# EAGLE board batteryholder2S6P_vertical (EAGLE 9.5.0)
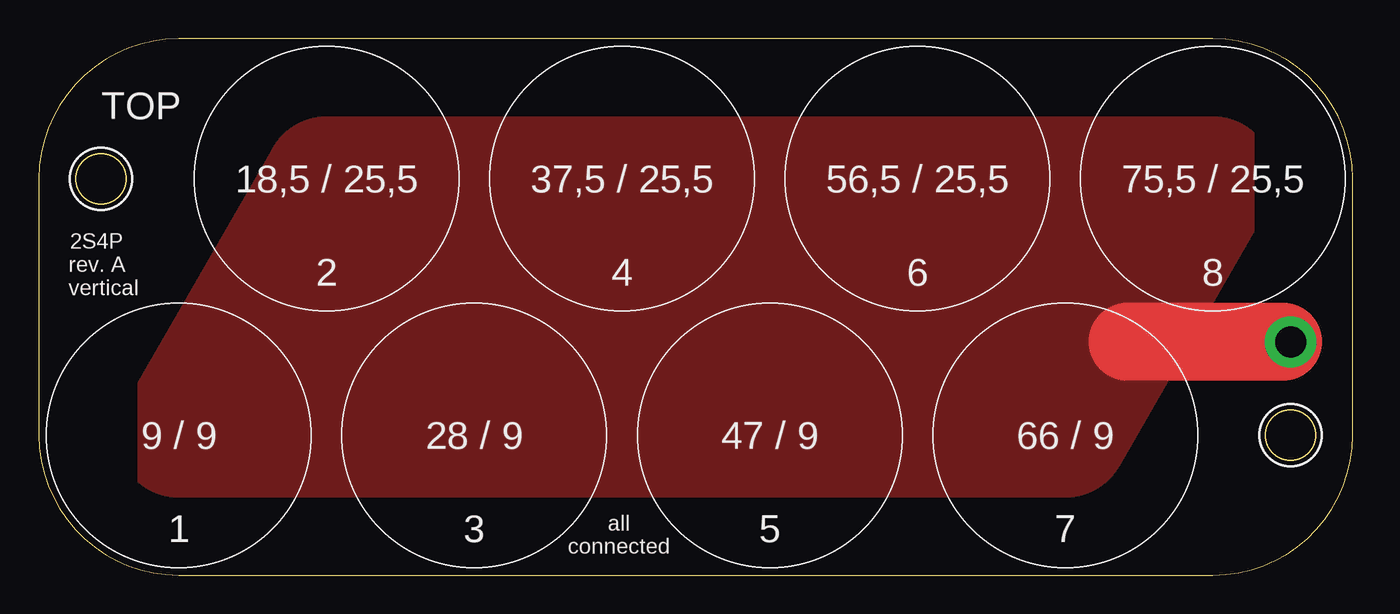
[diagram p0: board, top side]
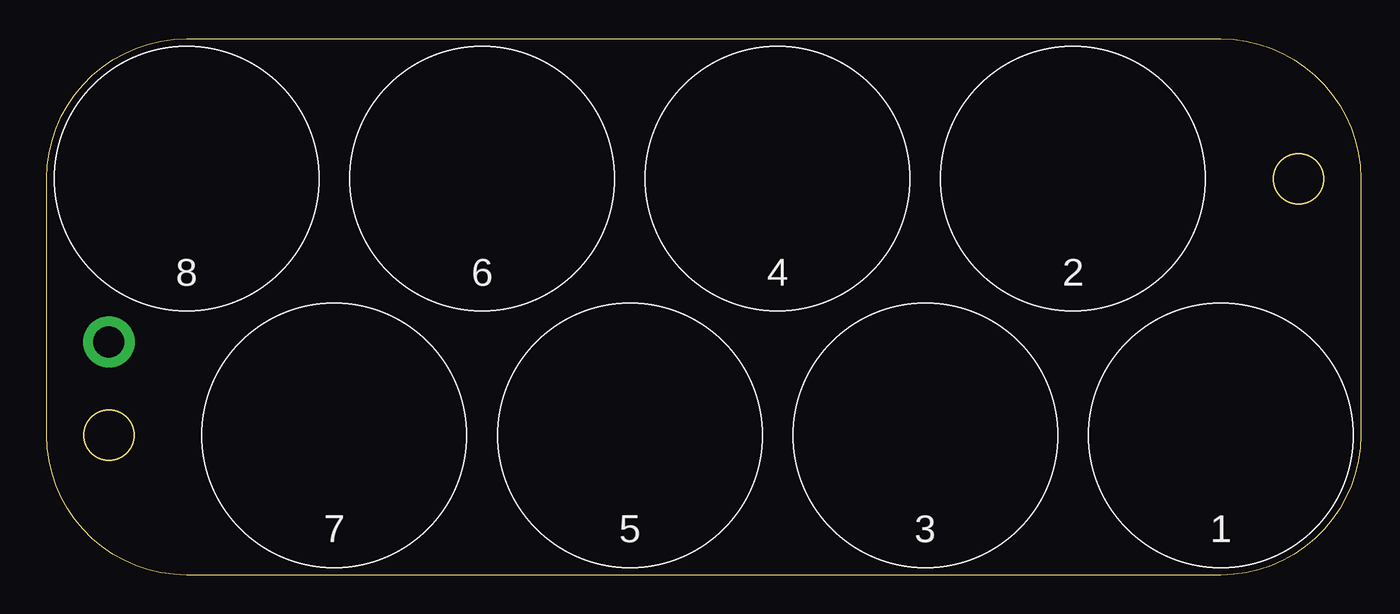
[diagram p1: board, bottom side, seen from below]

Size 84.5 x 34.5 mm. Coordinates in mm from the lower left corner, seen from the top.
Outline: 75.5,34.5 9,34.5 arc90 0,25.5 0,9 arc90 9,0 75.5,0 arc90 84.5,9 84.5,25.5 arc90 75.5,34.5
Outline: circle at 4,25.5 radius 1.6
Outline: circle at 80.5,9 radius 1.6
Copper layers (1*16): Top 0.035mm / dielectric 1.5mm / Bottom 0.035mm
Design rules "default": minimum track width 6mil, minimum drill 0.35mm, track to track 6mil, track to pad 6mil, pad to pad 6mil, via to via 6mil, smd to smd 6mil, copper to edge 40mil, drill to drill 6mil, minimum pad ring 10mil, minimum via ring 8mil, stop-mask expansion 4mil, vias tented up to drill 0mil, thermal gap 10mil

## Footprints (pad centres in the part's own frame; a part is rotated, then mirrored left to right if it is on the bottom)
1X01_2MM = drill 2 pad 3.302: 1 0,0

## Placement (x,y rotation side)
J2  [1X01_2MM]  80.5,15 0 top

## Library data of the parts
J2 = SparkFun-Connectors

## Tracks (layer width: path | path; a pad name or v marks a point on that pad's centre or on a via)
N$1
  Top 5: 80,15 70,15
  pour Top (no thermals): 9,9 18.5,25.5 75.5,25.5 66,9

## Text on the board
tPlace: TOP | 2S4P | rev. A | 2 | 4 | 6 | 8 | vertical | 1 | 3 | all / connected | 5 | 7
bPlace: 2 | 4 | 6 | 8 | 1 | 3 | 5 | 7
tNames: 18,5 / 25,5 | 37,5 / 25,5 | 56,5 / 25,5 | 75,5 / 25,5 | 9 / 9 | 28 / 9 | 47 / 9 | 66 / 9